# EAGLE board PAXController (EAGLE 4.13), part 1 of 2
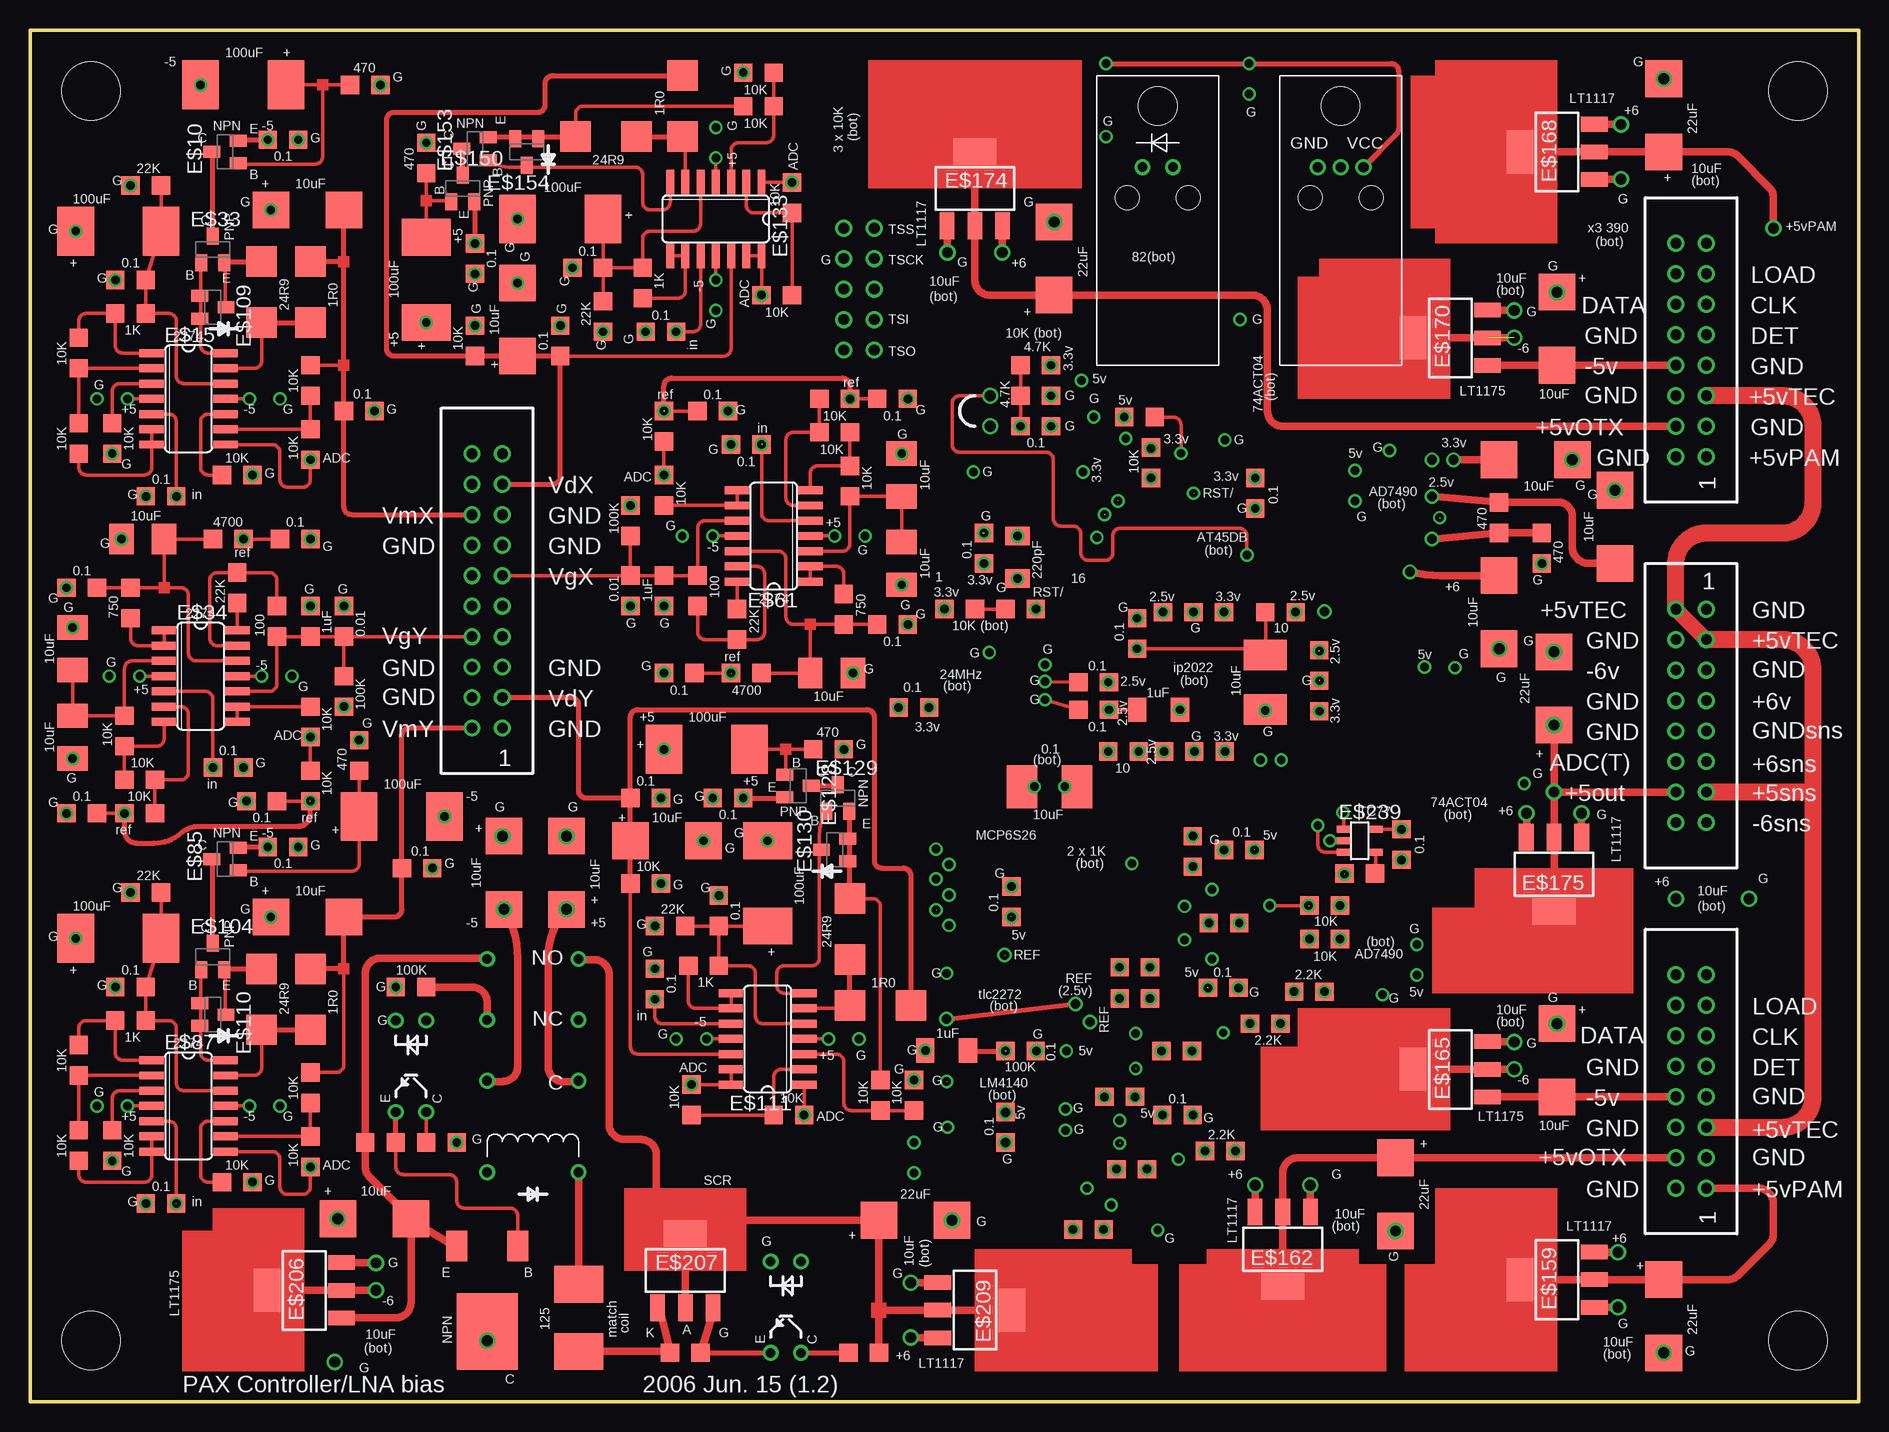
[diagram p0: board, top side]
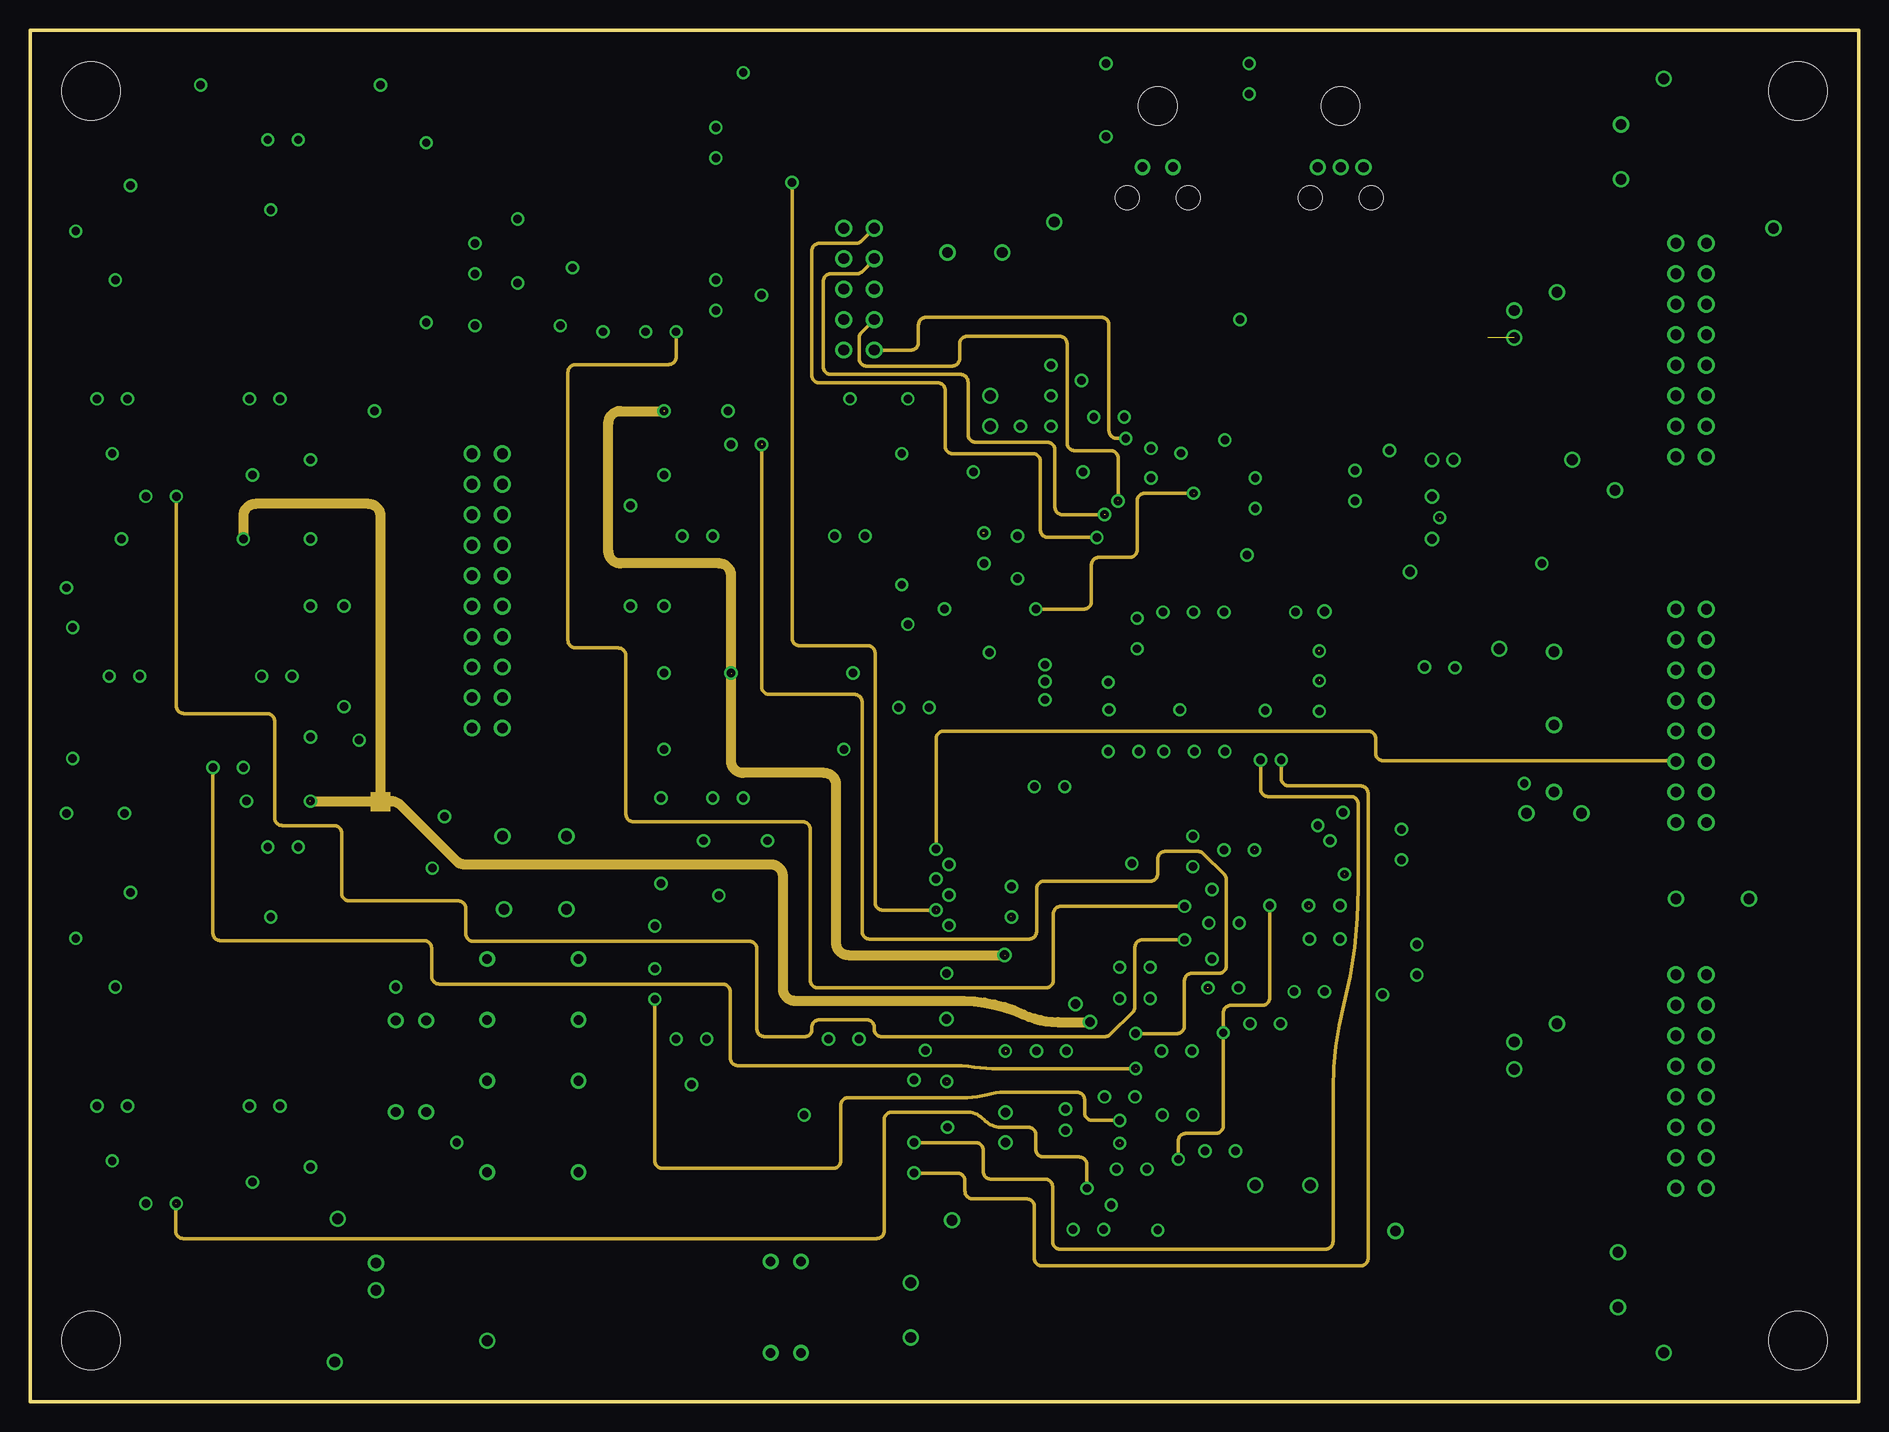
[diagram p1: board, inner layer Route2]
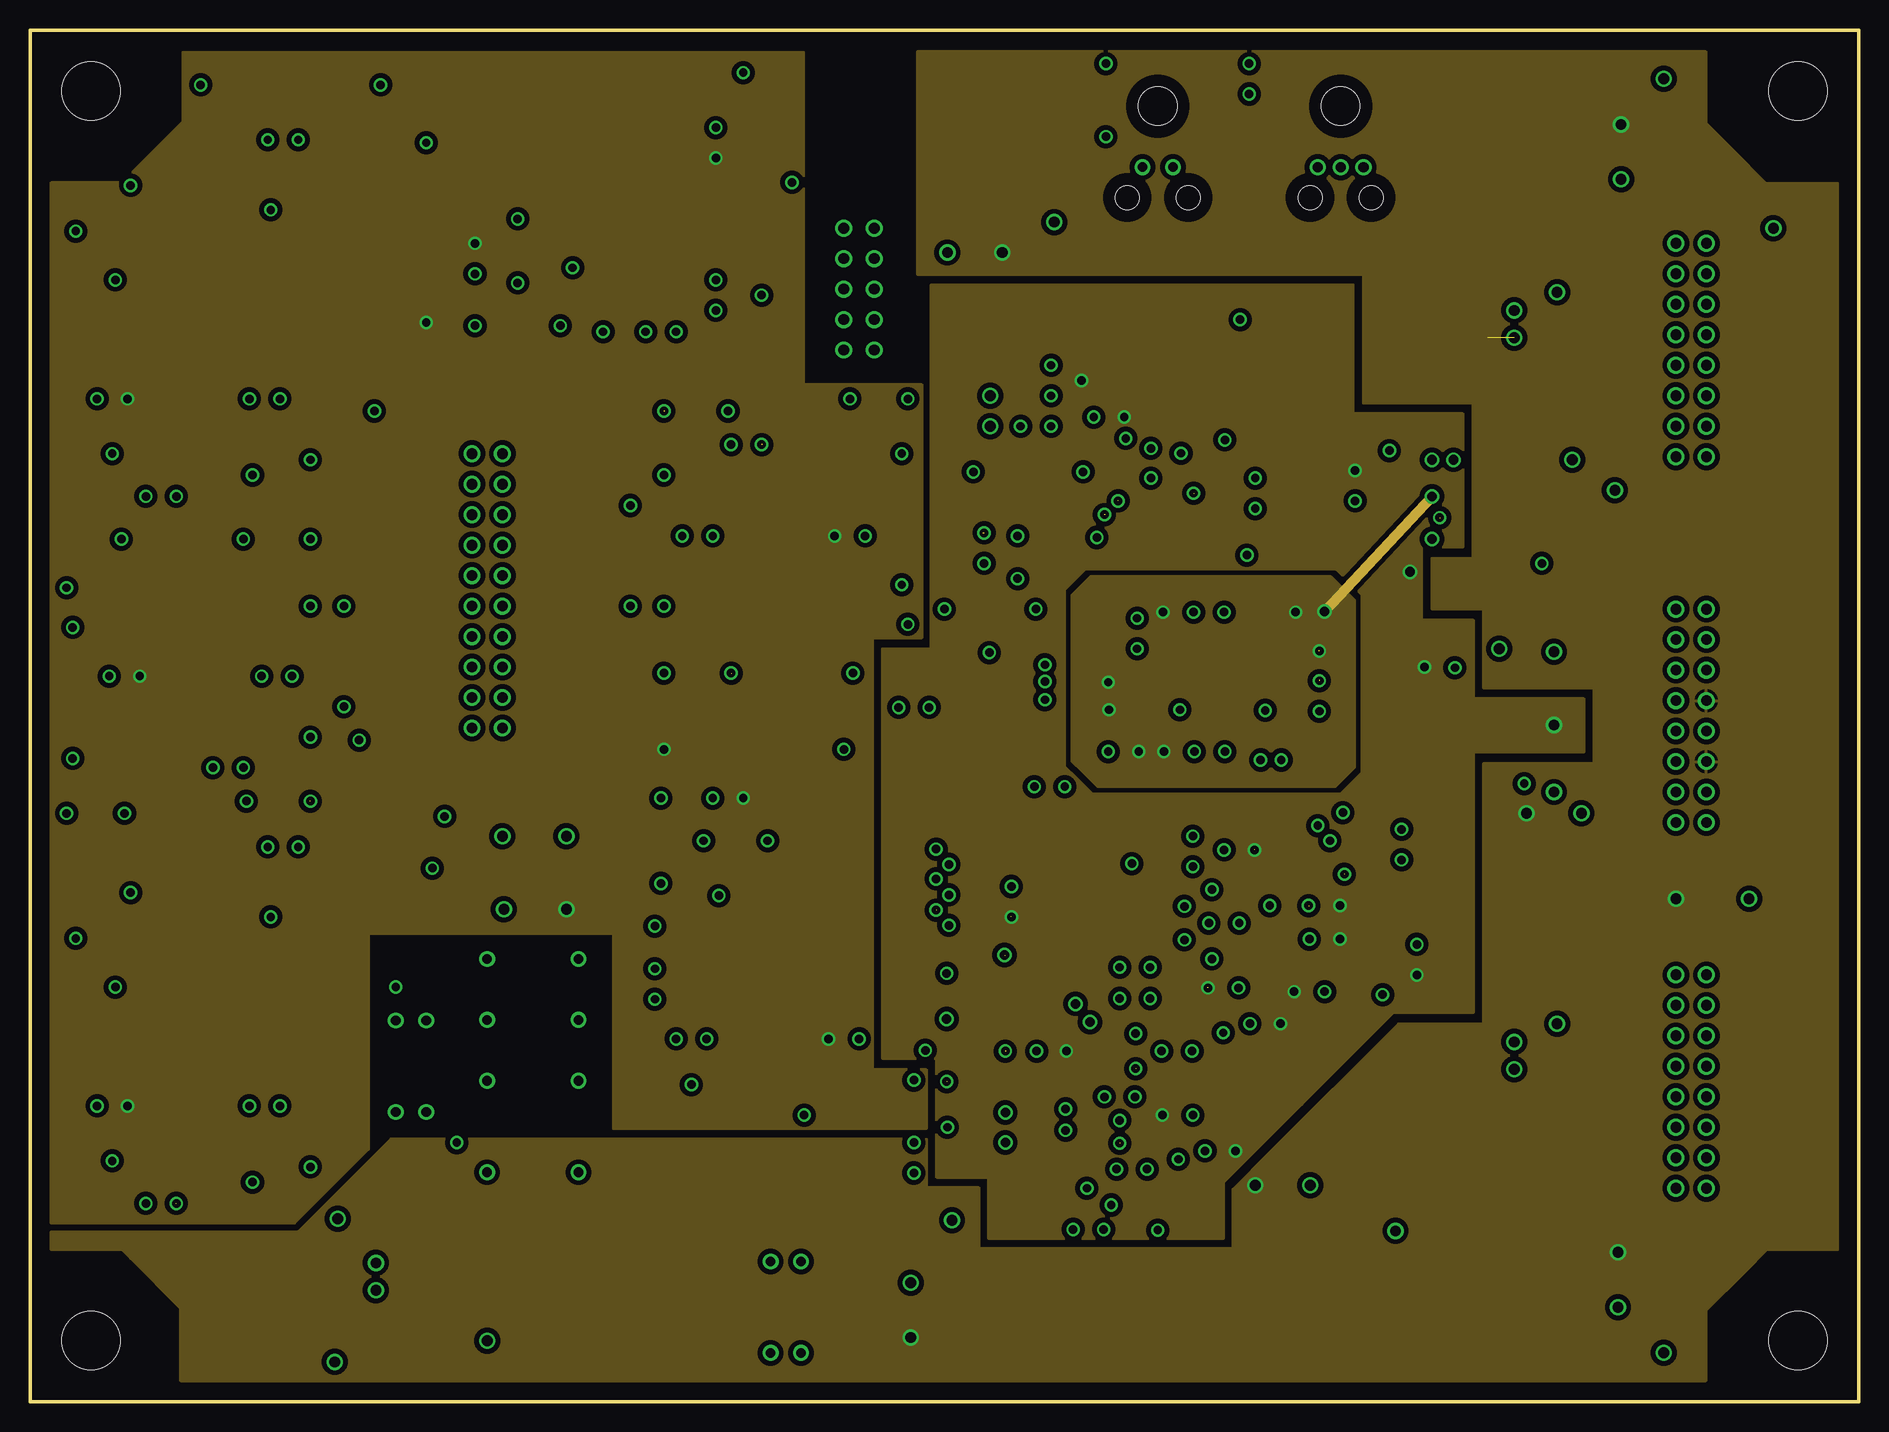
[diagram p2: board, inner layer Route3]
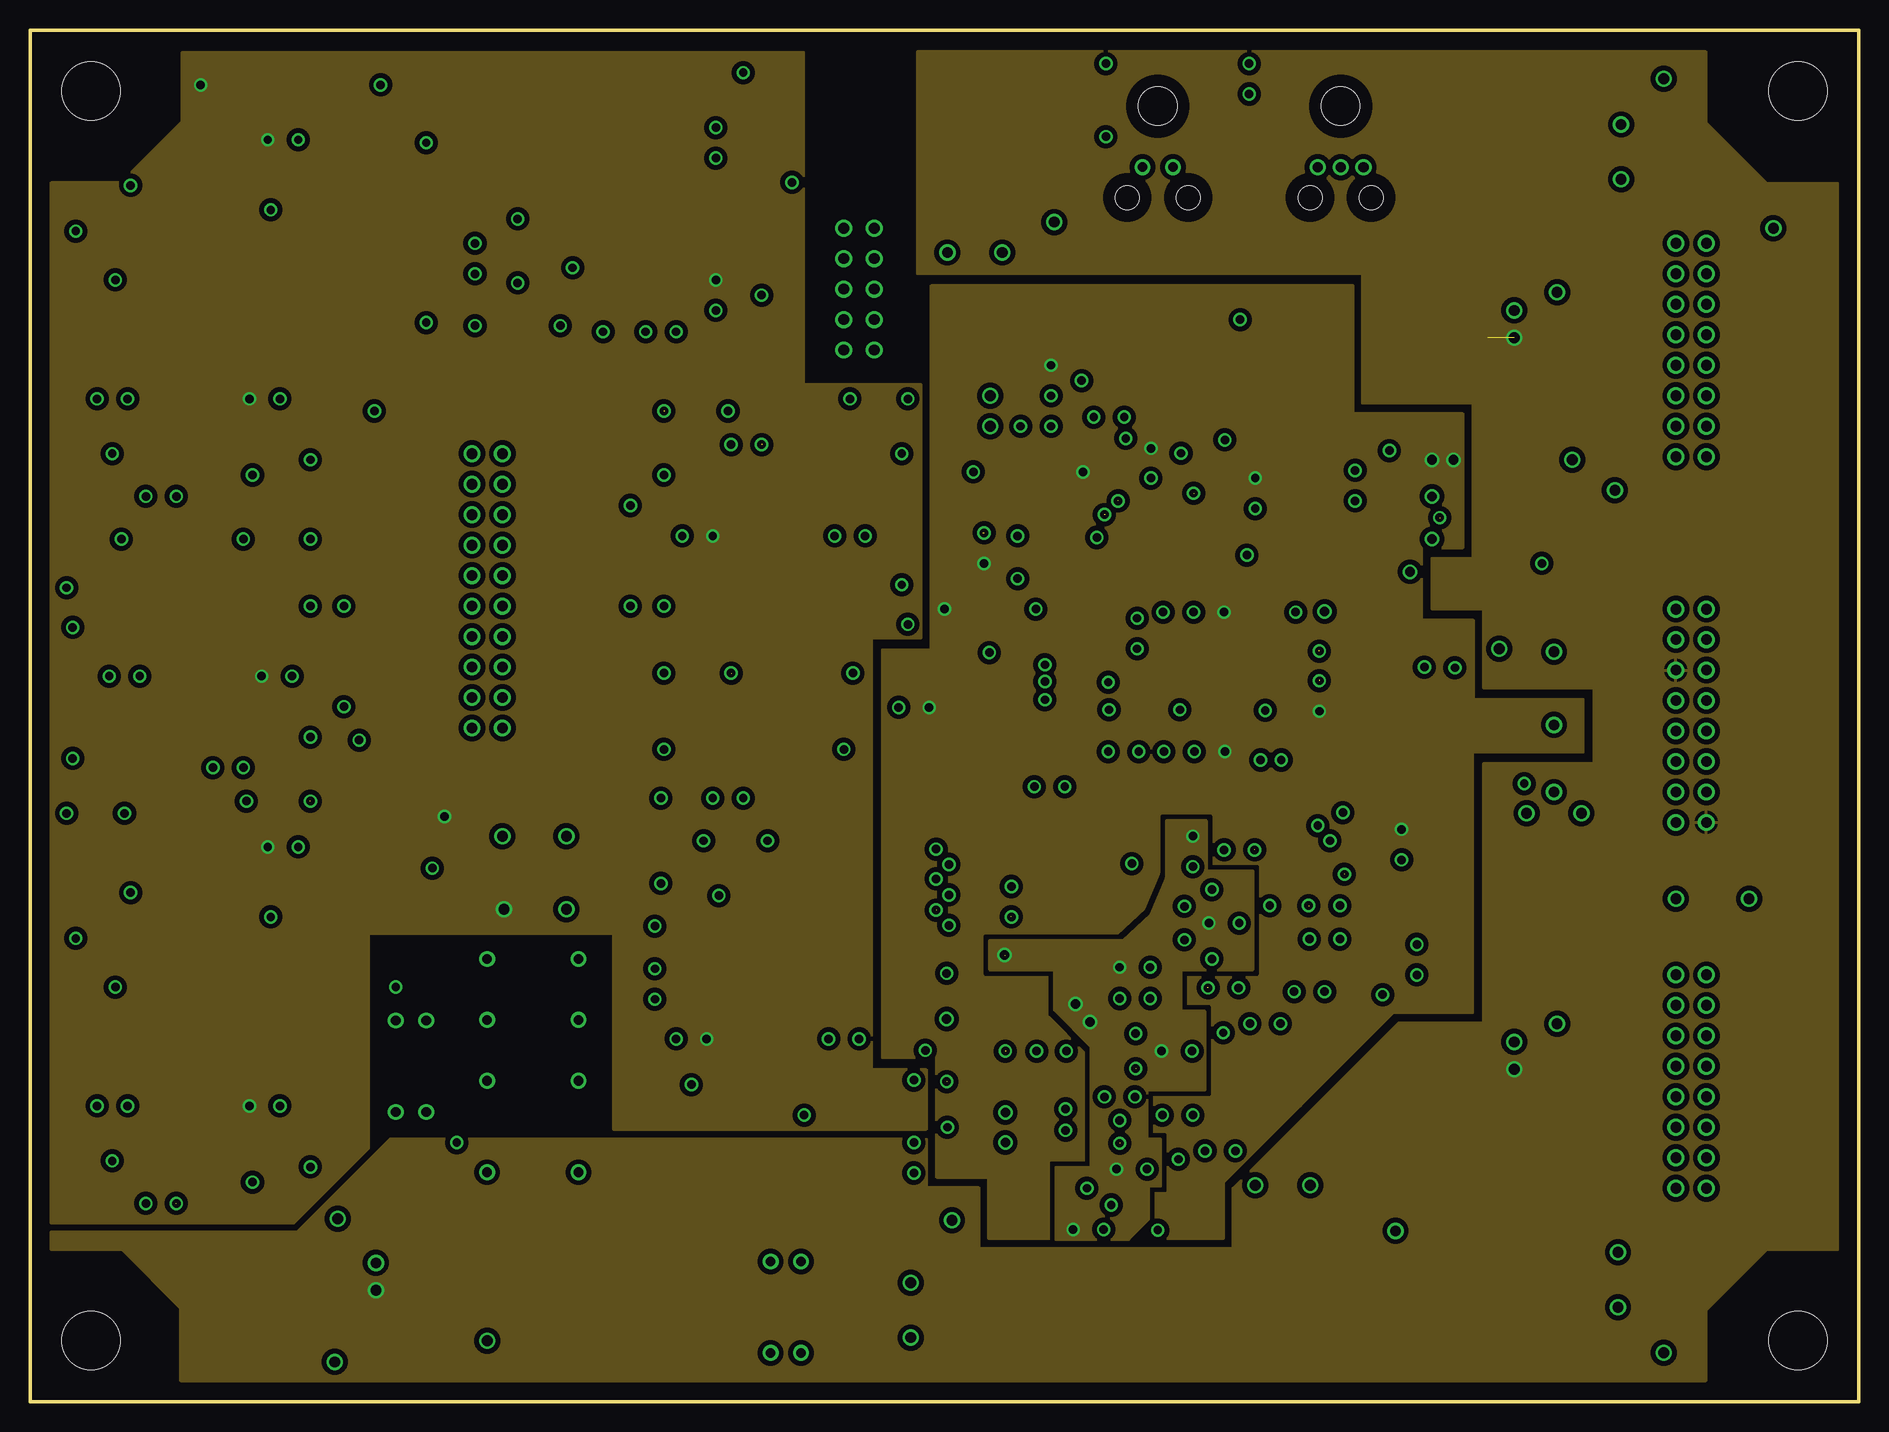
[diagram p3: board, inner layer Route14]
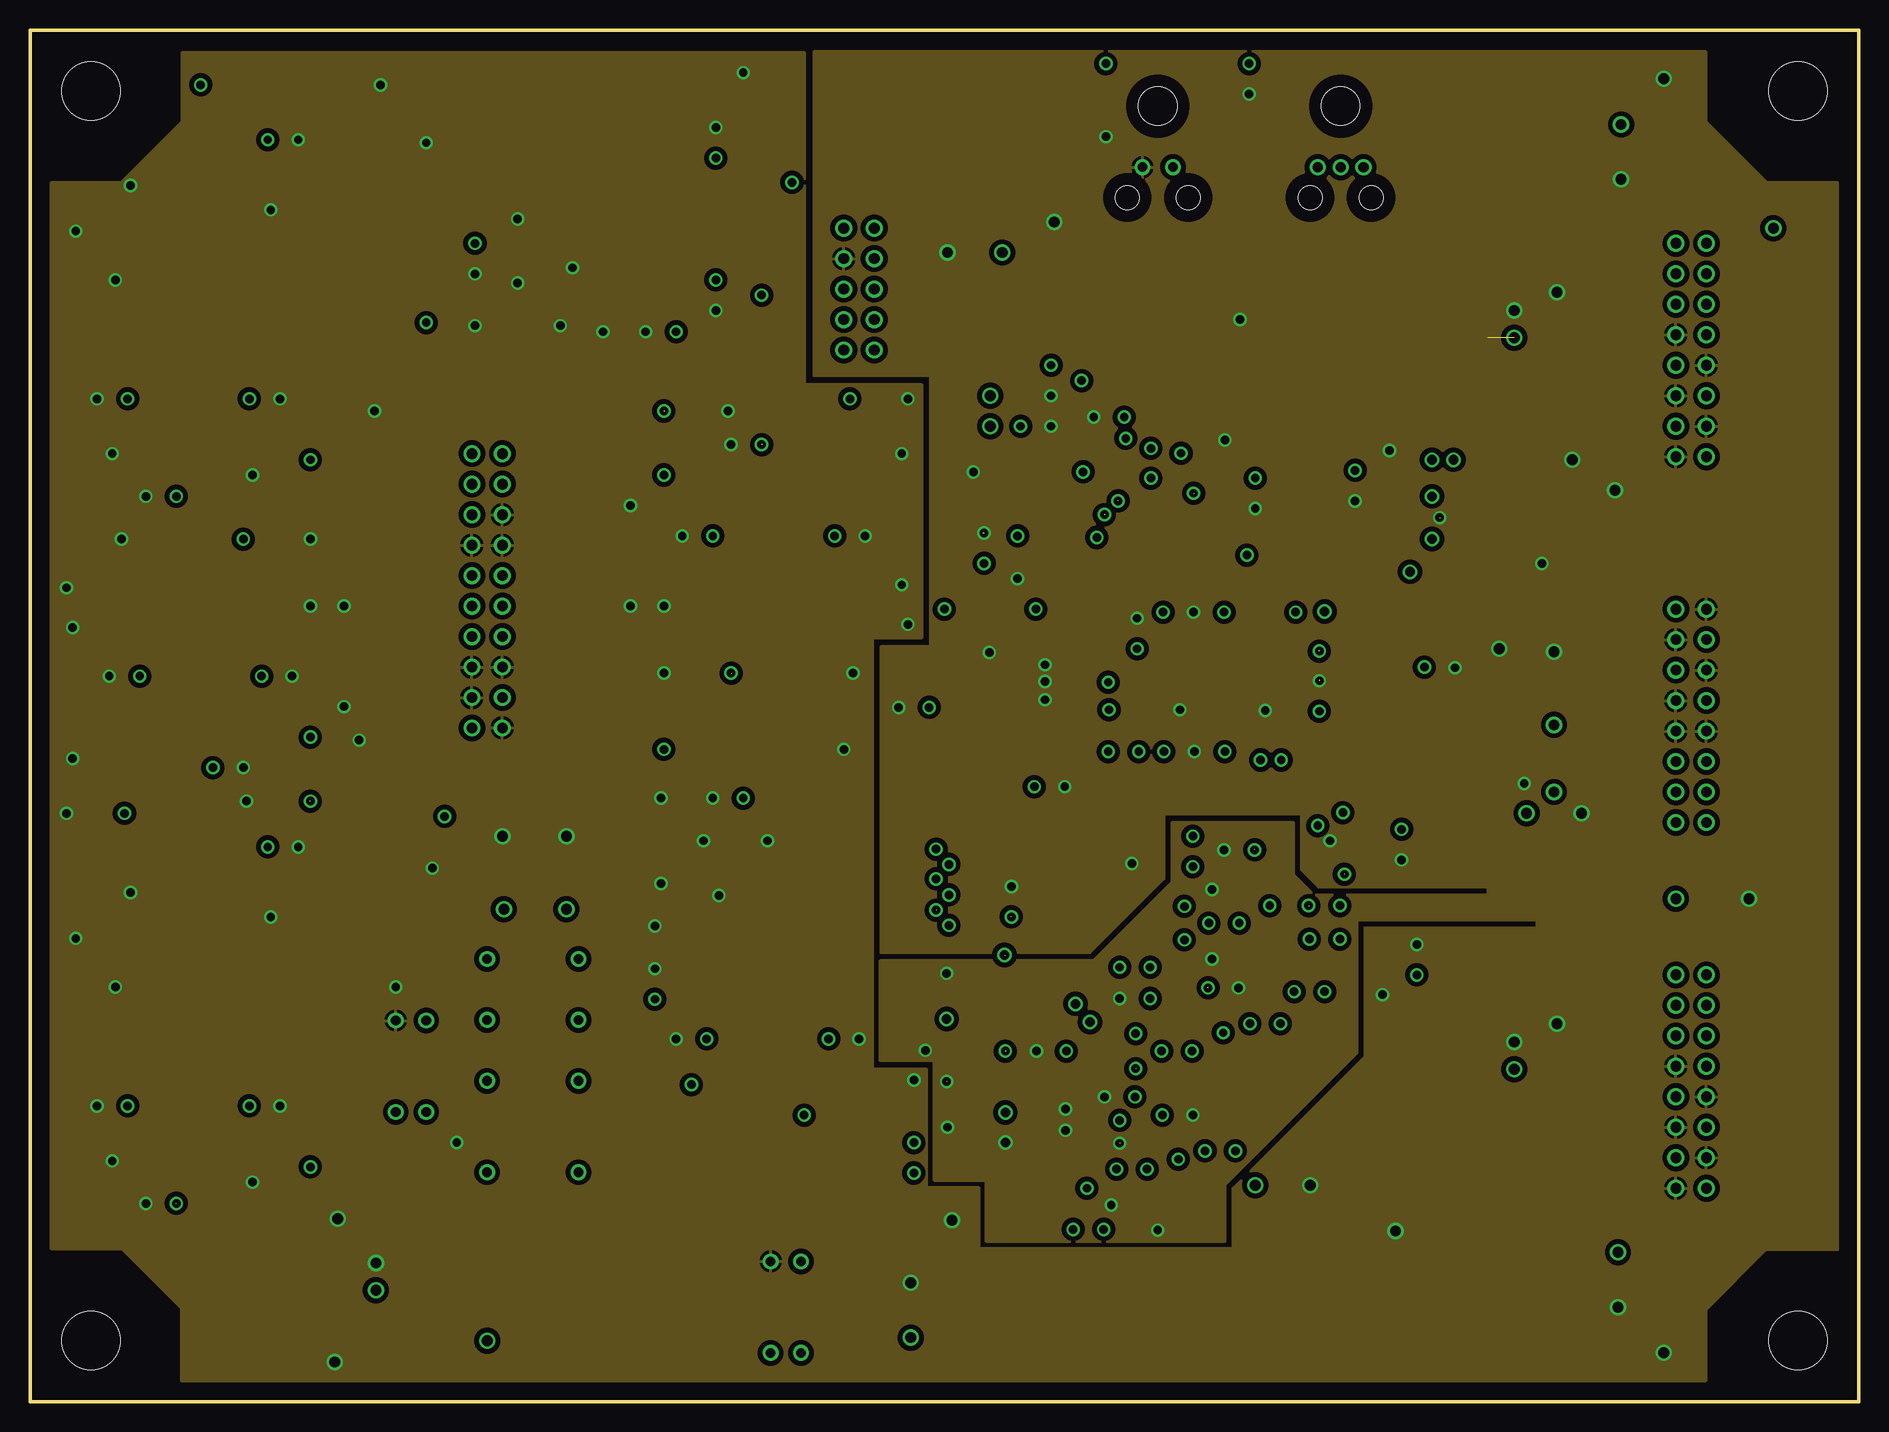
[diagram p4: board, inner layer Route15]
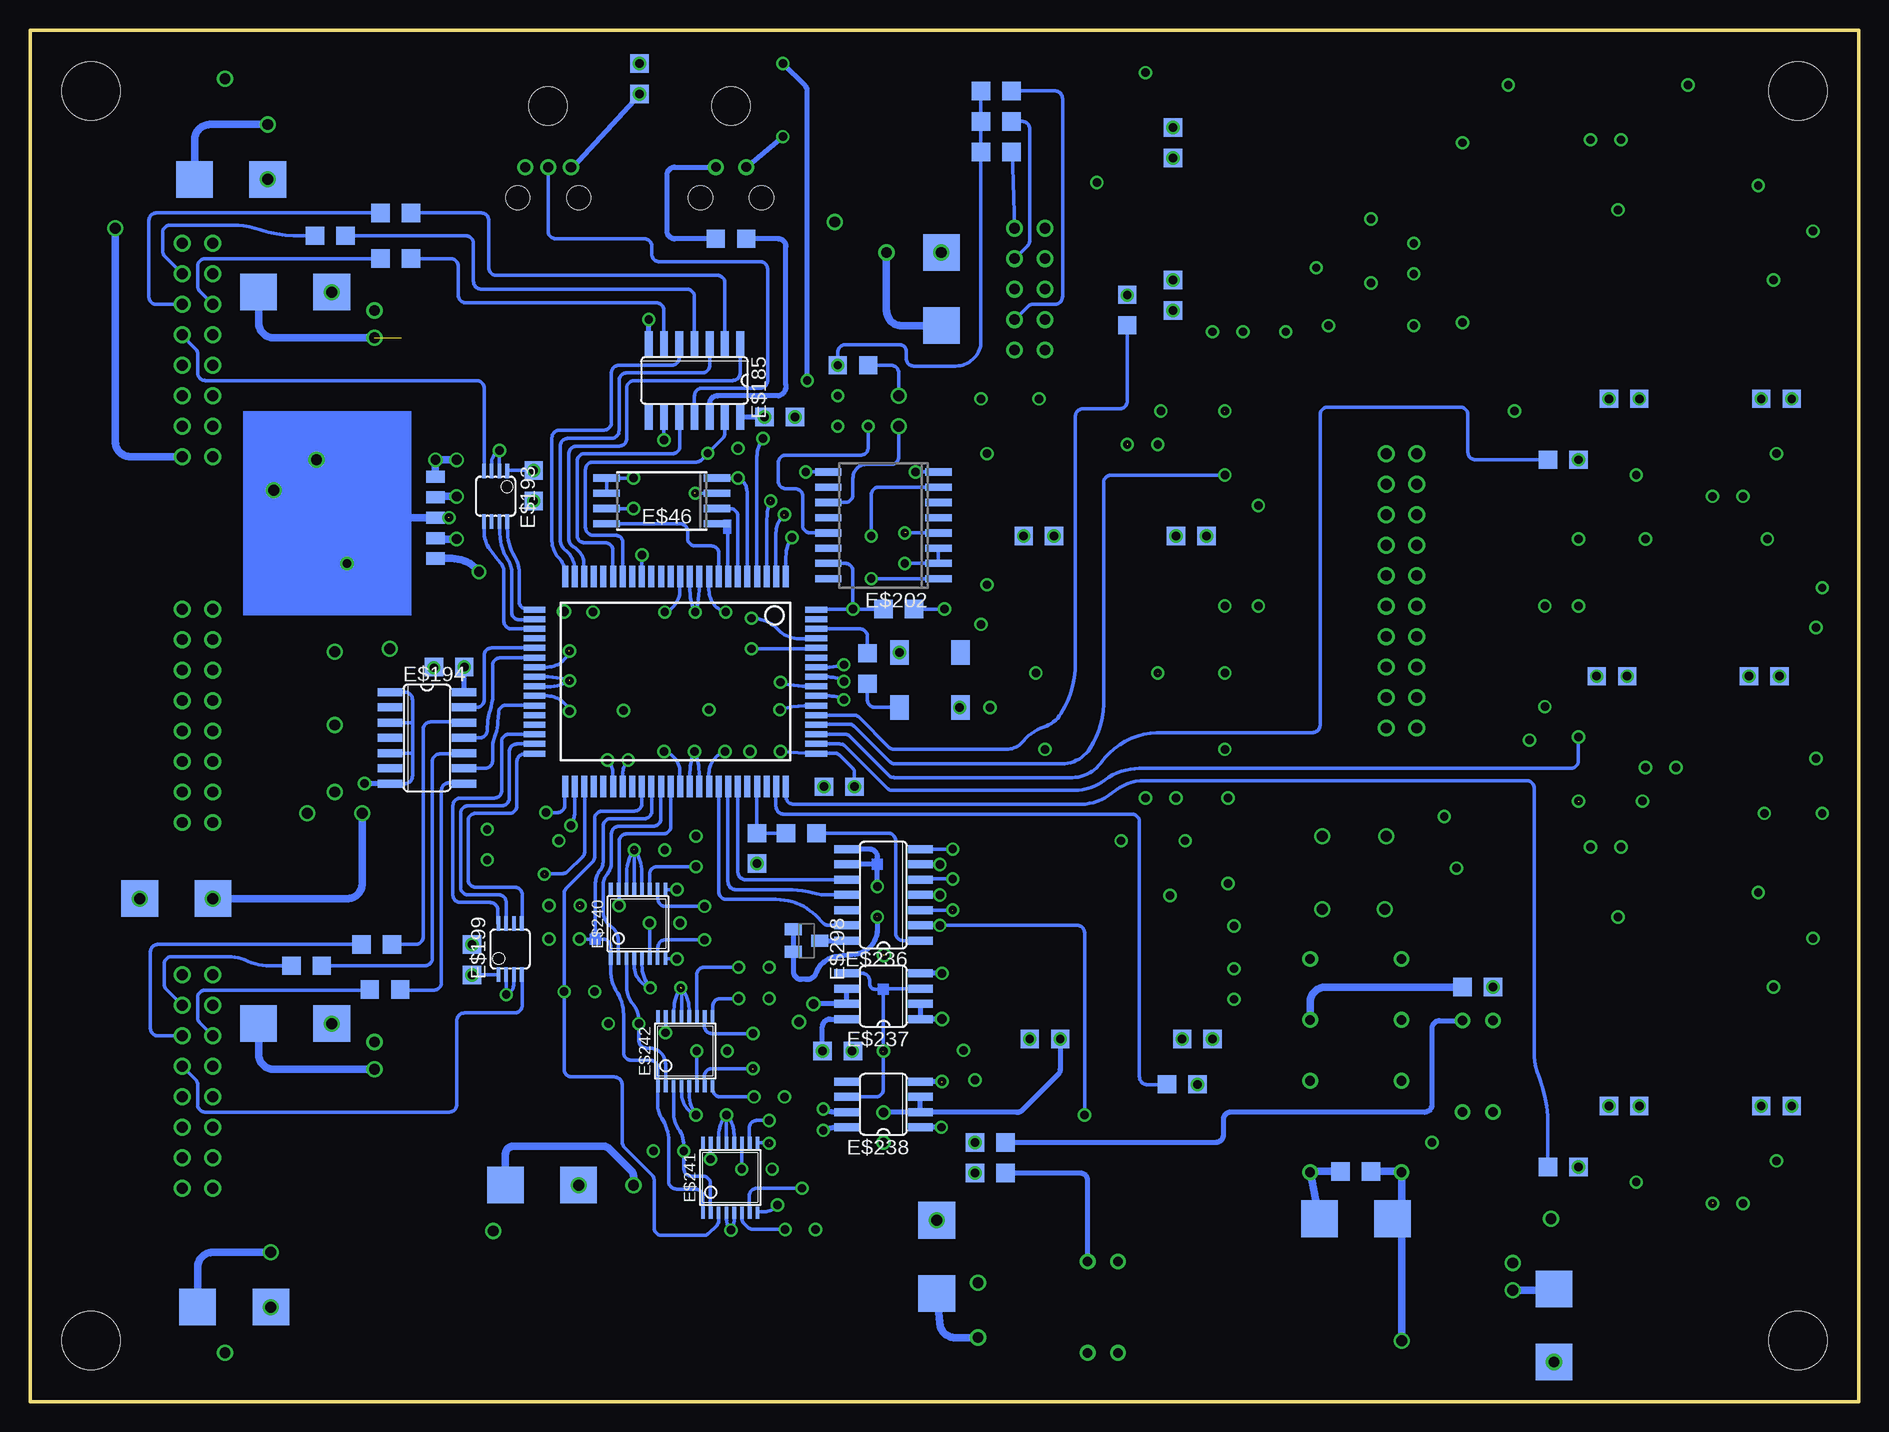
[diagram p5: board, bottom side, seen from below]

Size 152.4 x 114.3 mm. Coordinates in mm from the lower left corner, seen from the top.
Outline: 0,0 152.4,0 152.4,114.3 0,114.3 0,0
Copper layers (1*2+3*14+15*16): Top 0.035mm / dielectric 1.5mm / Route2 0.035mm / dielectric 0.15mm / Route3 0.035mm / dielectric 0.2mm / Route14 0.035mm / dielectric 0.15mm / Route15 0.035mm / dielectric 0.2mm / Bottom 0.035mm
Design rules "default": minimum track width 10mil, minimum drill 24mil, track to track 8mil, track to pad 8mil, pad to pad 8mil, via to via 8mil, smd to smd 8mil, copper to edge 40mil, drill to drill 8mil, minimum pad ring 10mil, minimum via ring 8mil, stop-mask expansion 4mil, vias tented up to drill 0mil, thermal gap 10mil
Holes 4.85 mm at 5.08,109.22 5.08,5.08 147.32,5.08 147.32,109.22

## Footprints (pad centres in the part's own frame; a part is rotated, then mirrored left to right if it is on the bottom)
IFD96 = drill 0.838 round: P$1 0,0; P$2 -1.905,0; P$3 1.905,0 | hole 2: -2.54,2.54; 2.54,2.54 | hole 3.2: 0,-5.08
IFE96 = drill 0.8 round: P$1 -1.27,0; P$2 1.27,0 | hole 3.2: 0,-5.08 | hole 2: -2.54,2.54; 2.54,2.54
2X8HEADER = drill 0.9 round: P$1 -1.27,1.27; P$2 -3.81,1.27; P$3 -6.35,1.27; P$4 -8.89,1.27; P$5 -8.89,-1.27; P$6 -6.35,-1.27; P$7 -3.81,-1.27; P$8 -1.27,-1.27; P$9 1.27,1.27; P$10 3.81,1.27; P$11 6.35,1.27; P$12 8.89,1.27; P$13 8.89,-1.27; P$14 6.35,-1.27; P$15 3.81,-1.27; P$16 1.27,-1.27
2X10HEADER = drill 0.9 round: P$1 -1.27,-1.27; P$2 -3.81,-1.27; P$3 -6.35,-1.27; P$4 -8.89,-1.27; P$5 -11.43,-1.27; P$6 -11.43,1.27; P$7 -8.89,1.27; P$8 -6.35,1.27; P$9 -3.81,1.27; P$10 -1.27,1.27; P$11 1.27,-1.27; P$12 3.81,-1.27; P$13 6.35,-1.27; P$14 8.89,-1.27; P$15 11.43,-1.27; P$16 11.43,1.27; P$17 8.89,1.27; P$18 6.35,1.27; P$19 3.81,1.27; P$20 1.27,1.27
CAP100UF = smd 3.048 x 4.064: P$1 -3.556,0; P$2 3.556,0
CAPRESISTOR0805 = smd 1.524 x 1.524: P$1 -1.27,0; P$2 1.27,0
2X5HEADER = drill 0.9 round: P$1 0,-1.27; P$2 -2.54,-1.27; P$3 -5.08,-1.27; P$4 2.54,-1.27; P$5 5.08,-1.27; P$6 -5.08,1.27; P$7 -2.54,1.27; P$8 0,1.27; P$9 2.54,1.27; P$10 5.08,1.27
SOT23 = smd 1 x 1.4: 1 -0.95,-1.1; 2 0.95,-1.1; 3 0,1.1
SO14 = smd 0.66 x 2.032: 1 -3.81,-3.073; 2 -2.54,-3.073; 3 -1.27,-3.073; 4 0,-3.073; 5 1.27,-3.073; 6 2.54,-3.073; 7 3.81,-3.073; 8 3.81,3.073; 9 2.54,3.073; 10 1.27,3.073; 11 0,3.073; 12 -1.27,3.073; 13 -2.54,3.073; 14 -3.81,3.073
RESISTORHALFWSMD = smd 2.54 x 2.54: P$1 -2.54,0; P$2 2.54,0
80PQFP = smd 0.5 x 1.8: 1 -9.2,-8.735; 2 -8.4,-8.735; 3 -7.6,-8.735; 4 -6.8,-8.735; 5 -6,-8.735; 6 -5.2,-8.735; 7 -4.4,-8.735; 8 -3.6,-8.735; 9 -2.8,-8.735; 10 -2,-8.735; 11 -1.2,-8.735; 12 -0.4,-8.735; 13 0.4,-8.735; 14 1.2,-8.735; 15 2,-8.735; 16 2.8,-8.735; 17 3.6,-8.735; 18 4.4,-8.735; 19 5.2,-8.735; 20 6,-8.735; 21 6.8,-8.735; 22 7.6,-8.735; 23 8.4,-8.735; 24 9.2,-8.735; 41 9.2,8.735; 42 8.4,8.735; 43 7.6,8.735; 44 6.8,8.735; 45 6,8.735; 46 5.2,8.735; 47 4.4,8.735; 48 3.6,8.735; 49 2.8,8.735; 50 2,8.735; 51 1.2,8.735; 52 0.4,8.735; 53 -0.4,8.735; 54 -1.2,8.735; 55 -2,8.735; 56 -2.8,8.735; 57 -3.6,8.735; 58 -4.4,8.735; 59 -5.2,8.735; 60 -6,8.735; 61 -6.8,8.735; 62 -7.6,8.735; 63 -8.4,8.735; 64 -9.2,8.735 | smd 1.8 x 0.5: 25 11.735,-5.2; 26 11.735,-4.4; 27 11.735,-3.6; 28 11.735,-2.8; 29 11.735,-2; 30 11.735,-1.2; 31 11.735,-6; 32 11.735,-0.4; 33 11.735,0.4; 34 11.735,1.2; 35 11.735,2; 36 11.735,2.8; 37 11.735,3.6; 38 11.735,4.4; 39 11.735,5.2; 40 11.735,6; 65 -11.735,6; 66 -11.735,5.2; 67 -11.735,4.4; 68 -11.735,3.6; 69 -11.735,2.8; 70 -11.735,2; 71 -11.735,1.2; 72 -11.735,0.4; 73 -11.735,-0.4; 74 -11.735,-1.2; 75 -11.735,-2; 76 -11.735,-2.8; 77 -11.735,-3.6; 78 -11.735,-4.4; 79 -11.735,-5.2; 80 -11.735,-6
CAP10UF = smd 3.048 x 3.048: P$1 -3.048,0; P$2 3.048,0
SO08W = smd 0.6 x 2.2: 1 -1.905,-4.6; 2 -0.635,-4.6; 3 0.635,-4.6; 4 1.905,-4.6; 5 1.905,4.6; 6 0.635,4.6; 7 -0.635,4.6; 8 -1.905,4.6
CERAMIC10UFSMD = smd 2.032 x 2.54: P$1 1.778,0; P$2 -1.778,0
SPAK-5L = smd 1.016 x 1.524: P$1 0,0; P$2 -1.702,0; P$3 -3.404,0; P$4 1.702,0; P$5 3.404,0
SOT223 = smd 1.219 x 2.235: 1 -2.311,-3.099; 2 0,-3.099; 3 2.311,-3.099 | smd 3.6 x 2.2: 4 0,3.099
MSOP08 = smd 0.3 x 1.2: 1 -0.976,-2.113; 2 -0.326,-2.113; 3 0.324,-2.113; 4 0.974,-2.113; 5 0.974,2.112; 6 0.324,2.112; 7 -0.326,2.112; 8 -0.976,2.112
SO16L = smd 0.6 x 2.2: 1 -4.445,-4.6; 2 -3.175,-4.6; 3 -1.905,-4.6; 4 -0.635,-4.6; 5 0.635,-4.6; 6 1.905,-4.6; 7 3.175,-4.6; 8 4.445,-4.6; 9 4.445,4.6; 10 3.175,4.6; 11 1.905,4.6; 12 0.635,4.6; 13 -0.635,4.6; 14 -1.905,4.6; 15 -3.175,4.6; 16 -4.445,4.6
PCB5VRELAY = drill 0.8 round: P$1 -3.81,0; P$2 3.81,0; P$3 -3.81,7.62; P$4 3.81,7.62; P$5 -3.81,-5.08; P$6 3.81,-5.08; P$7 -3.81,-10.16; P$8 3.81,-10.16
OPTOISOLATOR4PIN = drill 0.8 round: P$1 -3.81,1.27; P$2 -3.81,-1.27; P$3 3.81,1.27; P$4 3.81,-1.27
DPAK = smd 5.08 x 6.35: P$1 0,4.572 | smd 1.778 x 2.54: P$2 -2.54,-2.54; P$3 2.54,-2.54
RESISTOR1WSMD = smd 4.064 x 3.048: P$1 0,2.794; P$2 0,-2.794
CAP1UF = smd 1.524 x 2.032: P$3 -1.778,0; P$4 1.778,0
SO08 = smd 0.66 x 2.032: 1 -1.905,-3.073; 2 -0.635,-3.073; 3 0.635,-3.073; 4 1.905,-3.073; 5 1.905,3.073; 6 0.635,3.073; 7 -0.635,3.073; 8 -1.905,3.073
SOT23-5 = smd 0.6 x 1.2: 1 -0.95,-1.306; 2 0,-1.306; 3 0.95,-1.306; 4 0.95,1.306; 5 -0.95,1.306
TSSOP16 = smd 0.305 x 0.991: 1 -2.275,-2.918; 2 -1.625,-2.918; 3 -0.975,-2.918; 4 -0.325,-2.918; 5 0.325,-2.918; 6 0.975,-2.918; 7 1.625,-2.918; 8 2.275,-2.918; 9 2.275,2.918; 10 1.625,2.918; 11 0.975,2.918; 12 0.325,2.918; 13 -0.325,2.918; 14 -0.975,2.918; 15 -1.625,2.918; 16 -2.275,2.918
CAP10UFMIN = smd 2.54 x 3.556: P$1 -2.286,0; P$2 2.286,0
OSCSMD8X5 = smd 2.032 x 1.524: P$1 2.286,2.54; P$2 -2.286,2.54; P$3 -2.286,-2.54; P$4 2.286,-2.54

## Placement (x,y rotation side)
E$1  [IFD96]  109.22,102.87 180 top
E$2  [IFE96]  93.98,102.87 180 top
E$3  [2X8HEADER]  138.43,87.63 90 top
E$4  [2X8HEADER]  138.43,26.67 270 top
E$5  [2X8HEADER]  138.43,57.15 90 top
E$6  [2X10HEADER]  38.1,67.56 90 top
E$7  [CAP100UF]  17.78,109.73 0 top
E$8  [CAPRESISTOR0805]  27.94,109.73 0 top
E$9  [2X5HEADER]  69.09,92.71 90 top
E$10  [SOT23]  16.26,104.14 90 top
E$11  [JUNCTION012]  24.38,109.73 0 top
E$12  [JUNCTION012]  62.99,54.36 0 top
E$13  [CAPRESISTOR0805]  58.17,50.29 0 top
E$14  [CAPRESISTOR0805]  21.08,105.16 0 top
E$15  [SO14]  13.21,83.57 270 top
E$16  [CAPRESISTOR0805]  6.86,83.57 0 bottom
E$17  [CAPRESISTOR0805]  19.56,83.57 0 bottom
E$18  [CAPRESISTOR0805]  6.86,80.26 90 top
E$19  [CAPRESISTOR0805]  4.06,87.38 90 top
E$20  [CAPRESISTOR0805]  4.06,80.26 90 top
E$21  [CAPRESISTOR0805]  10.92,75.44 0 top
E$22  [CAPRESISTOR0805]  8.38,90.68 0 top
E$23  [CAPRESISTOR0805]  23.37,79.76 90 top
E$24  [CAPRESISTOR0805]  23.37,85.09 90 top
E$25  [RESISTORHALFWSMD]  19.3,92.46 90 top
E$26  [RESISTORHALFWSMD]  23.37,92.46 90 top
E$27  [CAPRESISTOR0805]  17.27,77.22 0 top
E$28  [JUNCTION012]  26.16,86.36 0 top
E$29  [CAPRESISTOR0805]  8.38,93.47 180 top
E$30  [CAPRESISTOR0805]  9.65,101.35 180 top
E$31  [CAP100UF]  7.37,97.54 0 top
E$32  [80PQFP]  98.62,60.01 180 bottom
E$33  [SOT23]  15.24,96.01 0 top
E$34  [SO14]  14.22,60.45 270 top
E$35  [CAPRESISTOR0805]  7.87,60.45 0 bottom
E$36  [CAPRESISTOR0805]  20.57,60.45 0 bottom
E$37  [CAPRESISTOR0805]  17.27,67.82 90 top
E$38  [CAPRESISTOR0805]  20.57,65.02 90 top
E$39  [CAPRESISTOR0805]  26.16,65.02 90 top
E$40  [CAPRESISTOR0805]  26.16,59.18 90 top
E$41  [CAP10UF]  23.11,99.31 0 top
E$42  [JUNCTION012]  26.16,95 0 top
E$43  [CAPRESISTOR0805]  23.37,65.02 90 top
E$44  [CAPRESISTOR0805]  9.14,51.82 180 top
E$45  [CAPRESISTOR0805]  7.87,55.88 270 top
E$46  [SO08W]  99.76,75.06 90 bottom
E$47  [CERAMIC10UFSMD]  3.56,62.74 90 top
E$48  [CERAMIC10UFSMD]  3.56,55.37 90 top
E$49  [CAPRESISTOR0805]  9.14,49.02 0 top
E$50  [CAPRESISTOR0805]  4.32,49.02 180 top
E$51  [CAPRESISTOR0805]  4.32,67.82 180 top
E$52  [CAPRESISTOR0805]  16.51,71.88 180 top
E$53  [CAPRESISTOR0805]  22.1,71.88 0 top
E$54  [CAPRESISTOR0805]  8.38,66.55 270 top
E$55  [CERAMIC10UFSMD]  9.4,71.88 0 top
E$56  [JUNCTION012]  11.18,67.82 0 top
E$57  [CAPRESISTOR0805]  23.37,56.64 90 top
E$58  [CAPRESISTOR0805]  23.37,51.31 90 top
E$59  [CAPRESISTOR0805]  19.3,50.04 180 top
E$60  [CAPRESISTOR0805]  16.51,52.83 180 top
E$61  [SO14]  61.98,72.14 90 top
E$62  [CAPRESISTOR0805]  68.33,72.14 180 bottom
E$63  [CAPRESISTOR0805]  55.63,72.14 180 bottom
E$64  [CAPRESISTOR0805]  58.93,64.77 270 top
E$65  [CAPRESISTOR0805]  55.63,67.56 270 top
E$66  [CAPRESISTOR0805]  50.04,67.56 270 top
E$67  [CAPRESISTOR0805]  50.04,73.41 270 top
E$68  [CAPRESISTOR0805]  67.06,80.77 0 top
E$69  [CAPRESISTOR0805]  68.33,76.71 90 top
E$70  [CERAMIC10UFSMD]  72.64,69.85 270 top
E$71  [CERAMIC10UFSMD]  72.64,77.22 270 top
E$72  [CAPRESISTOR0805]  67.06,83.57 180 top
E$73  [CAPRESISTOR0805]  71.88,83.57 0 top
E$74  [CAPRESISTOR0805]  71.88,64.77 0 top
E$75  [CAPRESISTOR0805]  59.69,60.71 0 top
E$76  [CAPRESISTOR0805]  54.1,60.71 180 top
E$77  [CAPRESISTOR0805]  67.82,66.04 90 top
E$78  [JUNCTION012]  65.02,64.77 180 top
E$79  [CAPRESISTOR0805]  52.83,75.95 270 top
E$80  [CAPRESISTOR0805]  52.83,81.28 270 top
E$81  [CAPRESISTOR0805]  56.9,82.55 0 top
E$82  [CAPRESISTOR0805]  59.69,79.76 0 top
E$83  [CERAMIC10UFSMD]  66.8,60.71 180 top
E$84  [CAPRESISTOR0805]  52.83,67.56 270 top
E$85  [SOT23]  16.26,45.21 90 top
E$86  [CAPRESISTOR0805]  21.08,46.23 0 top
E$87  [SO14]  13.21,24.64 270 top
E$88  [CAPRESISTOR0805]  6.86,24.64 0 bottom
E$89  [CAPRESISTOR0805]  19.56,24.64 0 bottom
E$90  [CAPRESISTOR0805]  6.86,21.34 90 top
E$91  [CAPRESISTOR0805]  4.06,28.45 90 top
E$92  [CAPRESISTOR0805]  4.06,21.34 90 top
E$93  [CAPRESISTOR0805]  10.92,16.51 0 top
E$94  [CAPRESISTOR0805]  8.38,31.75 0 top
E$95  [CAPRESISTOR0805]  23.37,20.83 90 top
E$96  [CAPRESISTOR0805]  23.37,26.16 90 top
E$97  [RESISTORHALFWSMD]  19.3,33.53 90 top
E$98  [RESISTORHALFWSMD]  23.37,33.53 90 top
E$99  [CAPRESISTOR0805]  17.27,18.29 0 top
E$100  [CAPRESISTOR0805]  32.26,44.45 180 top
E$101  [CAPRESISTOR0805]  8.38,34.54 180 top
E$102  [CAPRESISTOR0805]  9.65,42.42 180 top
E$103  [CAP100UF]  7.37,38.61 0 top
E$104  [SOT23]  15.24,37.08 0 top
E$105  [CAP10UF]  23.11,40.39 0 top
E$106  [JUNCTION012]  26.16,36.07 0 top
E$107  [CAP100UF]  30.99,48.77 0 top
E$108  [CAPRESISTOR0805]  27.43,53.85 90 top
E$109  [SOT23]  15.24,91.19 270 top
E$110  [SOT23]  15.24,32.26 270 top
E$111  [SO14]  61.47,30.23 90 top
E$112  [CAPRESISTOR0805]  55.12,30.23 0 bottom
E$113  [CAPRESISTOR0805]  67.82,30.23 0 bottom
E$114  [CAPRESISTOR0805]  52.07,34.8 90 top
E$115  [CAPRESISTOR0805]  55.12,25.15 90 top
E$116  [CAPRESISTOR0805]  63.25,23.88 0 top
E$117  [CAPRESISTOR0805]  56.13,36.32 180 top
E$118  [CAPRESISTOR0805]  57.4,40.89 90 top
E$119  [CAPRESISTOR0805]  53.34,39.62 180 top
E$120  [CAP100UF]  61.47,43.18 90 top
E$121  [CAPRESISTOR0805]  51.31,50.29 0 top
E$122  [CAPRESISTOR0805]  51.31,43.18 0 top
E$123  [CAP10UF]  53.09,46.74 0 top
E$124  [RESISTORHALFWSMD]  68.33,39.37 90 top
E$125  [RESISTORHALFWSMD]  70.87,33.02 180 top
E$126  [CAP100UF]  56.39,54.36 180 top
E$127  [CAPRESISTOR0805]  66.55,54.36 0 top
E$128  [SOT23]  64.01,51.31 270 top
E$129  [SOT23]  67.31,50.29 0 top
E$130  [SOT23]  67.06,45.97 90 top
E$131  [CAPRESISTOR0805]  70.87,25.53 90 top
E$132  [CAPRESISTOR0805]  73.66,25.53 270 top
E$133  [SO14]  57.15,98.55 180 top
E$134  [CAPRESISTOR0805]  57.15,92.2 270 bottom
E$135  [CAPRESISTOR0805]  57.15,104.9 270 bottom
E$136  [CAPRESISTOR0805]  62.23,92.2 180 top
E$137  [CAPRESISTOR0805]  63.5,100.33 90 top
E$138  [CAPRESISTOR0805]  52.58,89.15 180 top
E$139  [CAPRESISTOR0805]  51.05,93.22 270 top
E$140  [CAPRESISTOR0805]  46.48,94.49 180 top
E$141  [CAPRESISTOR0805]  47.75,90.42 270 top
E$142  [CAP100UF]  44.2,98.55 180 top
E$143  [CAPRESISTOR0805]  37.08,88.39 90 top
E$144  [CAPRESISTOR0805]  44.2,88.39 90 top
E$145  [CAP10UF]  40.64,90.17 90 top
E$146  [RESISTORHALFWSMD]  48.01,105.41 180 top
E$147  [RESISTORHALFWSMD]  54.36,107.95 270 top
E$148  [CAP100UF]  33.02,93.47 270 top
E$149  [CAPRESISTOR0805]  33.02,103.63 90 top
E$150  [SOT23]  36.07,101.09 0 top
E$151  [JUNCTION012]  33.02,100.08 90 top
E$152  [CAPRESISTOR0805]  37.08,95.25 90 top
E$153  [SOT23]  37.08,104.39 90 top
E$154  [SOT23]  41.4,104.14 180 top
E$155  [CAPRESISTOR0805]  60.71,107.95 180 top
E$156  [CAPRESISTOR0805]  60.71,110.74 0 top
E$157  [CAPRESISTOR0805]  27.43,82.55 0 top
E$158  [SPAK-5L]  118.62,73.66 90 bottom
E$159  [SOT223]  127.25,10.16 90 top
E$160  [CAP10UF]  135.38,7.87 180 bottom
E$161  [CAP10UF]  136.14,7.11 270 top
E$162  [SOT223]  104.39,12.7 180 top
E$163  [CAP10UF]  109.73,18.03 0 bottom
E$164  [CAP10UF]  113.79,17.27 90 top
E$165  [SOT223]  118.36,27.69 90 top
E$166  [CAP10UF]  130.3,31.5 0 bottom
E$167  [CAP10UF]  127.25,28.45 90 top
E$168  [SOT223]  127.25,104.14 90 top
E$169  [CAP10UF]  135.64,101.85 180 bottom
E$170  [SOT223]  118.36,88.65 90 top
E$171  [CAP10UF]  136.14,107.19 270 top
E$172  [CAP10UF]  130.3,92.46 0 bottom
E$173  [CAP10UF]  127.25,89.41 90 top
E$174  [SOT223]  78.74,101.09 0 top
E$175  [SOT223]  127,43.94 180 top
E$176  [CAP10UF]  76.45,92.71 90 bottom
E$177  [CAP10UF]  85.34,95.25 90 top
E$178  [CAP10UF]  140.21,41.91 0 bottom
E$179  [CAP10UF]  127,59.44 90 top
E$180  [CAP10UF]  122.43,65.79 270 top
E$181  [CAP10UF]  132.08,72.9 270 top
E$182  [CAP10UF]  125.48,78.49 0 top
E$183  [CAPRESISTOR0805]  122.43,73.66 90 top
E$184  [CAPRESISTOR0805]  125.98,71.12 90 top
E$185  [SO14]  97.03,85.09 180 bottom
E$186  [CAPRESISTOR0805]  89.92,82.04 180 bottom
E$187  [CAPRESISTOR0805]  101.6,110.24 90 bottom
E$188  [CAPRESISTOR0805]  93.98,96.9 0 bottom
E$189  [CAPRESISTOR0805]  121.92,95.25 0 bottom
E$190  [CAPRESISTOR0805]  121.92,99.06 0 bottom
E$191  [CAPRESISTOR0805]  127.38,97.16 0 bottom
E$192  [CAPRESISTOR0805]  110.43,76.33 270 bottom
E$193  [MSOP08]  113.6,75.44 180 bottom
E$194  [SO14]  119.32,55.31 270 bottom
E$195  [CAPRESISTOR0805]  117.47,61.21 0 bottom
E$196  [CAPRESISTOR0805]  129.35,36.32 0 bottom
E$197  [CAPRESISTOR0805]  123.51,38.1 0 bottom
E$198  [CAPRESISTOR0805]  122.81,34.35 0 bottom
E$199  [MSOP08]  112.39,37.72 0 bottom
E$200  [CAPRESISTOR0805]  115.57,36.83 90 bottom
E$201  [CAPRESISTOR0805]  95.69,65.79 180 top
E$202  [SO16L]  81.28,73.03 90 bottom
E$203  [PCB5VRELAY]  41.91,26.73 180 top
E$204  [OPTOISOLATOR4PIN]  62.99,7.87 270 top
E$205  [OPTOISOLATOR4PIN]  31.75,27.94 270 top
E$206  [SOT223]  22.86,9.27 90 top
E$207  [SOT223]  54.61,10.92 0 top
E$208  [DPAK]  38.1,10.41 180 top
E$209  [SOT223]  78.74,7.62 270 top
E$210  [CAP10UF]  28.7,15.24 0 top
E$211  [CAP10UF]  25.4,6.35 270 bottom
E$212  [CAP10UF]  41.91,15.24 0 bottom
E$213  [CAPRESISTOR0805]  41.91,19.18 0 bottom
E$214  [CAP10UF]  44.7,44.07 90 top
E$215  [CAP10UF]  39.5,44.07 90 top
E$216  [CAPRESISTOR0805]  29.21,21.59 0 top
E$217  [RESISTOR1WSMD]  45.72,6.99 0 top
E$218  [CAPRESISTOR0805]  34.29,21.59 180 top
E$219  [CAPRESISTOR0805]  31.75,34.54 0 top
E$220  [CAPRESISTOR0805]  31.75,34.54 180 bottom
E$221  [CAPRESISTOR0805]  54.61,4.06 0 top
E$222  [CAP10UF]  73.79,15.11 0 top
E$223  [CAP10UF]  76.83,12.06 270 bottom
E$224  [CAPRESISTOR0805]  69.47,4.06 0 top
E$225  [CAPRESISTOR0805]  72.39,19.05 0 bottom
E$226  [CAPRESISTOR0805]  72.39,21.59 0 bottom
E$227  [CAPRESISTOR0805]  83.82,86.36 0 top
E$228  [CAPRESISTOR0805]  83.82,83.82 0 top
E$229  [CAPRESISTOR0805]  83.82,81.28 0 top
E$230  [CAPRESISTOR0805]  83.82,86.36 0 bottom
E$231  [CAPRESISTOR0805]  82.55,66.04 0 top
E$232  [CAPRESISTOR0805]  77.47,66.04 0 top
E$233  [CAPRESISTOR0805]  80.01,66.04 180 bottom
E$234  [CAPRESISTOR0805]  79.5,71.12 90 top
E$235  [CAP1UF]  82.3,70.36 90 top
E$236  [SO14]  81.28,42.23 90 bottom
E$237  [SO08]  81.28,33.78 90 bottom
E$238  [SO08]  81.28,24.77 90 bottom
E$239  [SOT23-5]  110.81,46.74 270 top
E$240  [TSSOP16]  101.73,39.81 0 bottom
E$241  [TSSOP16]  94.04,18.67 0 bottom
E$242  [TSSOP16]  97.79,29.21 0 bottom
E$243  [CAPRESISTOR0805]  98.23,65.79 0 top
E$244  [CAPRESISTOR0805]  102.11,75.69 90 top
E$245  [CAPRESISTOR0805]  93.41,78.23 270 top
E$246  [CAPRESISTOR0805]  107.44,61.34 90 top
E$247  [CAPRESISTOR0805]  107.44,58.8 90 top
E$248  [CAPRESISTOR0805]  95.76,54.17 0 top
E$249  [CAPRESISTOR0805]  98.3,54.17 0 top
E$250  [CAPRESISTOR0805]  110.81,44.01 0 top
E$251  [CAPRESISTOR0805]  114.3,46.42 270 top
E$252  [CAP10UFMIN]  84.96,51.24 0 top
E$253  [CAPRESISTOR0805]  71.88,109.22 0 bottom
E$254  [CAPRESISTOR0805]  71.88,106.68 0 bottom
E$255  [CAPRESISTOR0805]  71.88,104.14 0 bottom
E$256  [CAPRESISTOR0805]  91.12,54.17 0 top
E$257  [CAPRESISTOR0805]  84.96,51.24 0 bottom
E$258  [OSCSMD8X5]  77.41,60.13 90 bottom
E$259  [CAPRESISTOR0805]  104.2,65.79 180 top
E$260  [CAPRESISTOR0805]  92.27,64.01 270 top
E$261  [CAP10UFMIN]  102.93,59.94 90 top
E$262  [CAPRESISTOR0805]  88.65,57.66 180 top
E$263  [CAPRESISTOR0805]  88.65,59.94 180 top
E$264  [CAP1UF]  94.04,57.66 180 top
E$265  [CAPRESISTOR0805]  73.66,57.85 0 top
E$266  [CAPRESISTOR0805]  82.61,61.09 270 bottom
E$267  [CAP1UF]  76.39,29.27 0 top
E$268  [CAPRESISTOR0805]  82.55,29.21 0 top
E$269  [CAPRESISTOR0805]  85.09,29.21 180 bottom
E$270  [JUNCTION012]  81.28,34.35 0 bottom
E$271  [CAPRESISTOR0805]  81.28,22.86 90 top
E$272  [JUNCTION012]  81.79,44.77 0 bottom
E$273  [CAPRESISTOR0805]  81.79,41.66 90 top
E$274  [CAPRESISTOR0805]  88.14,47.37 0 bottom
E$275  [CAPRESISTOR0805]  91.82,46.1 90 bottom
E$276  [CAPRESISTOR0805]  107.89,41.34 0 top
E$277  [CAPRESISTOR0805]  107.89,38.54 0 top
E$278  [CAPRESISTOR0805]  96.9,45.85 270 top
E$279  [CAPRESISTOR0805]  100.77,45.97 180 top
E$280  [JUNCTION012]  105.28,38.54 0 bottom
E$281  [CAPRESISTOR0805]  102.93,31.5 180 top
E$282  [CAPRESISTOR0805]  99.19,20.89 180 top
E$283  [CAPRESISTOR0805]  99.44,34.48 0 top
E$284  [CAPRESISTOR0805]  95.63,23.88 0 top
E$285  [CAPRESISTOR0805]  106.62,34.16 0 top
E$286  [CAPRESISTOR0805]  91.82,19.37 0 top
E$287  [CAPRESISTOR0805]  88.2,14.35 0 top
E$288  [CAPRESISTOR0805]  92.46,82.04 0 top
E$289  [CAPRESISTOR0805]  92.08,36.2 0 top
E$290  [CAPRESISTOR0805]  92.08,33.59 0 top
E$291  [CAPRESISTOR0805]  95.57,29.21 0 top
E$292  [CAPRESISTOR0805]  90.81,25.4 0 top
E$293  [CAPRESISTOR0805]  99.5,39.88 0 top
E$294  [CAPRESISTOR0805]  60.96,90.96 90 bottom
E$295  [CAPRESISTOR0805]  24.64,78.49 0 bottom
E$296  [CAPRESISTOR0805]  56.39,26.45 0 bottom
E$297  [CAPRESISTOR0805]  24.64,19.56 0 bottom
E$298  [SOT23]  87.69,38.42 270 bottom

## Library data of the parts
E$1-E$9 E$11-E$14 E$16-E$31 E$35-E$45 E$47-E$60 E$62-E$84 E$86 E$88-E$103 E$105-E$108 E$112-E$127 E$131 E$132 E$134-E$149 E$151 E$152 E$155-E$158 E$160 E$161 E$163 E$164 E$166 E$167 E$169 E$171-E$173 E$176-E$184 E$186-E$192 E$195-E$198 E$200 E$201 E$203-E$205 E$208 E$210-E$235 E$243-E$297 = rfa
E$10 E$33 E$85 E$104 E$109 E$110 E$128-E$130 E$150 E$153 E$154 E$298 = transistor
E$15 E$34 E$61 E$87 E$111 E$133 E$185 E$194 E$236-E$238 = 74ac-logic
E$32 = ubicom_v2
E$46 E$159 E$162 E$165 E$168 E$170 E$174 E$175 E$206 E$207 E$209 = smd-ipc
E$193 E$199 E$239 = burr-brown
E$202 = linear
E$240-E$242 = maxim

## Nets
GND: E$2.P$2 E$3.P$2 E$3.P$4 E$3.P$6 E$3.P$8 E$3.P$9 E$4.P$8 E$4.P$9 E$4.P$11 E$4.P$13 E$4.P$15 E$5.P$1 E$5.P$8 E$5.P$9 E$5.P$11 E$5.P$13 E$5.P$15 E$6.P$3 E$6.P$5 E$6.P$7 E$6.P$8 E$6.P$12 E$6.P$13 E$6.P$19 E$9.P$9 E$158.P$1 E$204.P$2 E$205.P$2 E$219.P$1 E$222.P$2 E$262.P$2 E$263.P$2
REF25: E$49.P$1 E$50.P$1 E$52.P$1 E$53.P$1 E$59.P$1 E$72.P$1 E$73.P$1 E$75.P$1 E$76.P$1 E$81.P$1
S$1: E$288.P$2
S$2: E$158.P$3
S$4: E$7.P$2 E$8.P$1
S$5: E$23.P$1
S$6: E$136.P$2
S$7: E$115.P$2
S$9: E$95.P$1
S$13: E$18.P$2
S$15: E$19.P$1 E$20.P$2
S$16: E$20.P$1
S$19: E$19.P$2 E$22.P$1
S$20: E$22.P$2 E$29.P$1 E$30.P$1 E$31.P$2
S$21: E$27.P$1
S$23: E$23.P$2 E$24.P$1
S$24: E$80.P$2
S$26: E$25.P$1 E$26.P$1
S$27: E$25.P$2
S$28: E$6.P$18 E$24.P$2 E$26.P$2 E$41.P$2
S$38: E$37.P$1
S$39: E$37.P$2 E$38.P$2
S$40: E$6.P$9 E$38.P$1 E$39.P$1 E$40.P$2
S$46: E$44.P$2 E$45.P$2
S$47: E$44.P$1 E$49.P$2
S$48: E$45.P$1 E$47.P$2
S$52: E$54.P$2
S$53: E$51.P$1 E$52.P$2 E$54.P$1
S$63: E$57.P$2
S$68: E$65.P$1 E$66.P$1 E$67.P$2
S$71: E$68.P$2 E$69.P$2
S$72: E$68.P$1 E$72.P$2
S$73: E$69.P$1 E$70.P$2
S$78: E$77.P$2
S$79: E$74.P$1 E$75.P$2 E$77.P$1
S$80: E$230.P$2
S$88: E$79.P$2
S$91: E$64.P$1
S$92: E$64.P$2 E$65.P$2
S$94: E$107.P$1 E$108.P$1
S$100: E$90.P$2
S$102: E$91.P$1 E$92.P$2
S$103: E$92.P$1
S$104: E$93.P$2
S$106: E$91.P$2 E$94.P$1
S$107: E$99.P$1
S$109: E$95.P$2 E$96.P$1
S$112: E$97.P$1 E$98.P$1
S$113: E$97.P$2
S$119: E$94.P$2 E$101.P$1 E$102.P$1 E$103.P$2
S$130: E$6.P$4 E$121.P$1 E$122.P$1 E$125.P$1
S$132: E$131.P$1 E$132.P$2
S$133: E$126.P$1 E$127.P$1
S$139: E$116.P$2
S$140: E$115.P$1 E$116.P$1
S$141: E$58.P$2
S$142: E$124.P$1
S$143: E$3.P$7 E$4.P$10 E$5.P$6 E$5.P$12 E$5.P$14
S$144: E$117.P$2
S$145: E$117.P$1 E$118.P$1 E$119.P$1 E$120.P$1
S$146: E$124.P$2 E$131.P$2
S$157: E$148.P$1 E$149.P$1
S$165: E$155.P$1 E$156.P$2
S$167: E$137.P$2
S$168: E$136.P$1 E$137.P$1
S$170: E$146.P$1
S$171: E$139.P$2
S$172: E$139.P$1 E$140.P$1 E$141.P$1 E$142.P$1
S$174: E$146.P$2 E$155.P$2
S$179: E$6.P$14 E$143.P$1 E$144.P$1 E$147.P$1
S$181: E$6.P$6 E$96.P$2 E$98.P$2 E$105.P$2
S$182: E$4.P$12 E$161.P$1
S$187: E$4.P$14 E$164.P$2
S$191: E$4.P$16 E$167.P$1
S$195: E$3.P$1 E$173.P$1
S$197: E$3.P$5 E$171.P$2
S$200: E$3.P$3 E$177.P$1
S$219: E$183.P$1 E$184.P$2
S$223: E$2.P$1 E$188.P$1
S$226: E$188.P$2
S$227: E$1.P$1
S$229: E$3.P$10 E$189.P$1
S$230: E$3.P$15 E$190.P$1
S$231: E$3.P$14 E$191.P$1
S$232: E$189.P$2
S$234: E$190.P$2
S$243: E$4.P$7
S$244: E$4.P$3
S$245: E$4.P$2
S$252: E$4.P$1
S$258: E$205.P$3 E$218.P$2
S$261: E$210.P$2 E$216.P$1
S$263: E$213.P$2
S$264: E$212.P$1 E$213.P$1
S$270: E$205.P$4 E$208.P$2 E$216.P$2
S$271: E$217.P$2
S$272: E$221.P$2
S$277: E$224.P$2
S$278: E$222.P$1
S$280: E$204.P$3 E$224.P$1
S$281: E$204.P$4
S$282: E$204.P$1 E$225.P$2
S$283: E$205.P$1
S$290: E$231.P$1 E$232.P$2
S$292: E$233.P$2
S$299: E$228.P$1
S$301: E$9.P$3
S$303: E$9.P$2 E$253.P$2
S$305: E$9.P$5
S$309: E$219.P$2
S$339: E$9.P$4 E$254.P$2
S$353: E$261.P$2
S$373: E$258.P$2 E$266.P$2
S$378: E$267.P$4
S$394: E$274.P$2
S$395: E$274.P$1 E$275.P$2
S$399: E$276.P$1
S$420: E$114.P$1
S$433: E$138.P$1
S$434: E$21.P$2
V5: E$1.P$2 E$5.P$3 E$180.P$1 E$186.P$2
V25: E$181.P$2 E$183.P$2 E$264.P$4
V33: E$182.P$1 E$233.P$1 E$253.P$1
VN6: E$5.P$5 E$5.P$10 E$166.P$1 E$170.2 E$172.P$1
VP6: E$5.P$7 E$5.P$16 E$160.P$2 E$163.P$1 E$169.P$2 E$223.P$2